# Altium PCB DMX8x8A-v1.PcbDoc
Units mm, origin at the board's own origin, x right, y up, seen from the top; angles counter-clockwise.
Board outline 152.4 x 101.6 mm, 2 copper layers (Top Layer, Bottom Layer); 46 components, 13 nets, 206 pads, 0 vias.
Unrouted connection lines stored in the file: 41.
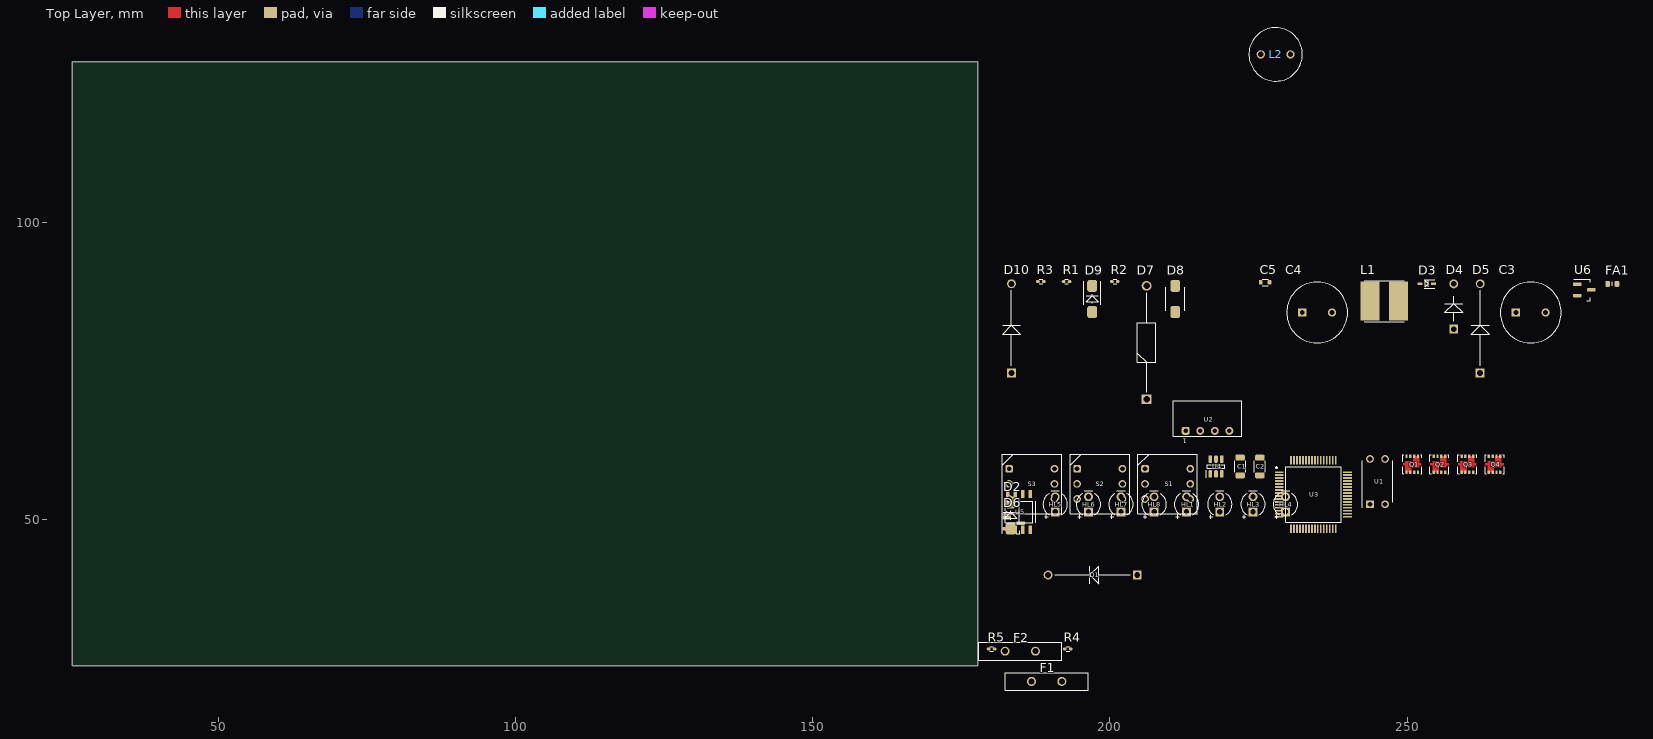
[diagram p0: Top Layer view]
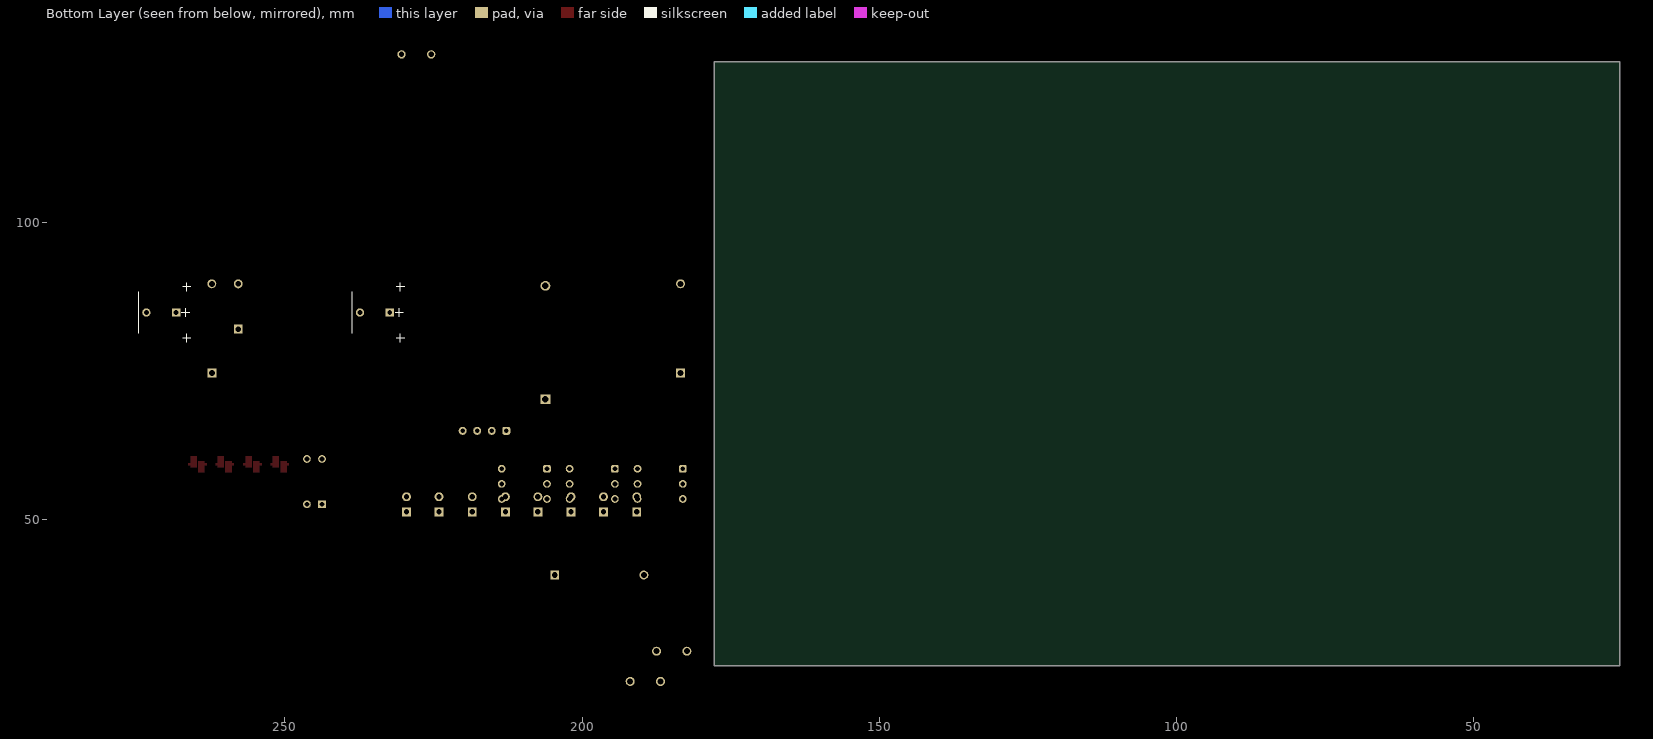
[diagram p1: Bottom Layer view, seen from below]

## Layer stack, top to bottom
Top Solder: solder mask 0.0102, Solder Resist, Dk 3.5
Top Layer: signal copper 0.0356
Dielectric 1: dielectric 0.32, FR-4, Dk 4.8
Bottom Layer: signal copper 0.0356
Bottom Solder: solder mask 0.0102, Solder Resist, Dk 3.5

## Board outline
25.4,25.4 177.8,25.4 177.8,127 25.4,127

## Design rules (kind name [scope] priority, off if disabled: settings)
Clearance [All] p1: gap=0.254 ignorepadtopadclearanceinfootprint=FALSE except(0: Arc-Hole Track-Hole SMDPad-Hole THPad-Hole Via-Hole Fill-Hole Poly-Hole Region-Hole Text-Hole)
PolygonConnect [All] p1: connectstyle=Relief reliefconductorwidth=0.254 reliefentries=4 polygonreliefangle="90 Angle" airgapwidth=0.254
RoomDefinition IOs.DMX8x8A [InComponentClass('IOs.DMX8x8A')] p1: confinementstyle=ConfineIn formatcopy=TRUE lockcomponents=FALSE outline 178.943,26.797 195.199,26.797 195.199,31.369 178.943,31.369
RoomDefinition Top.DMX8x8A-v1 [InComponentClass('Top.DMX8x8A-v1')] p2: confinementstyle=ConfineIn formatcopy=TRUE lockcomponents=FALSE outline 181.651,47.207 266.614,47.207 266.614,61.177 181.651,61.177
RoutingVias [All] p1: holewidth=0.711 width=1.27 viastyle="Through Hole" minholewidth=0.711 minwidth=1.27 maxholewidth=0.711 maxwidth=1.27
SolderMaskExpansion [All] p1: expansion=0.102 istentingtop=FALSE
Width [All] p1: maxlimit=0.254 minlimit=0.254 preferedwidth=0.254
30 further rules are at their usual default settings.

## Classes and differential pairs
component class IOs.DMX8x8A: F1 F2 R4 R5
component class Top.DMX8x8A-v1: C1 C2 C3 C4 C5 D1 D2 D3 D4 D5 D6 D7 D8 D9 D10 FA1 HL1 HL2 HL3 HL4 HL5 HL6 HL7 HL8 L1 L2 Q1 Q2 Q3 Q4 R1 R2 R3 S1 S2 S3 U1 U2 U3 U4 U5 U6

## Components (designator, comment, footprint, x,y, rotation, side; value= is the part's Value field where it differs from the comment)
C1 "10 50V 5%" C1206_r 221.91,58.891 r90 top value=10
C2 "10 50V 5%" C1206_r 225.212,58.891 r90 top value=10
C3 "35ZL470MEFC10X20" CAPPRD500W60D1025H1750 270.805,84.799 r0 top
C4 "35ZL470MEFC10X20" CAPPRD500W60D1025H1750 234.864,84.799 r0 top
C5 "1500p 25V 20%" C0603_r 226.101,89.879 r0 top value=1500p
D1 "SR102" "DO-204AL (DO-41)" 197.097,40.64 r180 top
D2 "SS14" "DO-214AC (SMA)" 183.302,50.636 r90 top
D3 "DDZ24" SOD323F 253.279,89.625 r0 top
D4 "1N5253B" "DO-204AH (DO-35).SLDPRT" 257.851,85.815 r90 top
D5 "1N4749A / BZV85C24" "DO-204AL (DO-41)" 262.296,82.132 r90 top
D6 "BZX84C24" "SOT-23-3 (3)" 183.81,49.366 r0 top
D7 "P6KE24CA" "DIOAD1910W90L670D310 (DO-15)" 206.162,70.194 r90 top
D8 "SMAJ30CA" "DO-214AC (SMA) biplar" 210.988,87.085 r90 top
D9 "SS14" "DO-214AC (SMA)" 197.018,87.085 r90 top
D10 "SR102" "DO-204AL (DO-41)" 183.429,82.132 r90 top
F1 "0ZRA0800FF" 0ZRA0800FF 189.357,22.733 r0 top
F2 "0ZRA0800FF" 0ZRA0800FF 184.912,27.813 r0 top
FA1 "MFU0603FF00800P100" FUSC1608X55N 284.521,89.625 r0 top
HL1 "3AR4UC10" "LED-2pin 2.54mm" 212.893,52.541 r90 top
HL2 "3AR4UC10" "LED-2pin 2.54mm" 218.481,52.541 r90 top
HL3 "3AR4UC10" "LED-2pin 2.54mm" 224.069,52.541 r90 top
HL4 "3AR4UC10" "LED-2pin 2.54mm" 229.53,52.541 r90 top
HL5 "3AR4UC10" "LED-2pin 2.54mm" 190.795,52.541 r90 top
HL6 "3AR4UC10" "LED-2pin 2.54mm" 196.383,52.541 r90 top
HL7 "3AR4UC10" "LED-2pin 2.54mm" 201.844,52.541 r90 top
HL8 "3AR4UC10" "LED-2pin 2.54mm" 207.432,52.541 r90 top
L1 "CDRH6D38NP-101NC" INDPM6767X400N 246.167,86.704 r0 top value=100uH
L2 "RLB0914-101KL" RLB0914 227.879,128.233 r0 top value=100uH
Q1 "AON7804" AON7804 250.866,59.272 r0 top
Q2 "AON7804" AON7804 255.438,59.272 r0 top
Q3 "AON7804" AON7804 260.137,59.272 r0 top
Q4 "AON7804" AON7804 264.709,59.272 r0 top
R1 "1k 5%" R0402_r 192.7,90.006 r0 top value=1k
R2 "3k 5%" R0402_r 200.828,90.006 r0 top value=3k
R3 "0 5%" R0402_r 188.382,90.006 r0 top value=0
R4 "0 5%" R0402_r 192.913,28.194 r0 top value=0
R5 "0 5%" R0402_r 180.086,28.194 r0 top value=0
S1 "1825007-1" 1825007-1 209.718,55.97 r0 top
S2 "1825007-1" 1825007-1 198.288,55.97 r0 top
S3 "1825007-1" 1825007-1 186.858,55.97 r0 top
U1 "FOD617BSD" FOD617BSD 245.024,56.351 r90 top
U2 "AM1SS-0505SJZ" AM1S 216.416,64.897 r180 top
U3 "STM32F103R8T7" "LQFP64 (QFP50P1200X1200X160-64N)" 234.229,54.192 r0 top
U4 "MAX3283E" "SOT23-6 (SOT95P280X145-6N)" 217.846,58.891 r90 top
U5 "LM2594DADJ" SOIC-8 184.699,51.271 r90 top
U6 "AP2120N-3.3TRG1" "SOT-23-3 (3)" 279.822,88.609 r0 top

## Footprints (in the part's own frame and the unit in brackets; to place one, negate y for a bottom-side part, rotate by r counter-clockwise, add the part's x,y. Pads: shape width x height; smd on the part's side, far side on the other; paste and mask are expansions set on the pad)
0ZRA0800FF [mm]
  round 1.515 hole 1.01: 1(-2.55,0) 2(2.55,0)
  silkscreen extent -7,-1.5 7,1.5, body extent -4.45,-1.5 4.45,1.5, height 12.9
1825007-1 [mm]
  rrect50% 1.3x1.3 hole 0.8: 1(-3.81,2.54)
  round 1.3 hole 0.8: 2(-3.81,0) 3(-3.81,-2.54) 4(3.81,-2.54) 5(3.81,0) 6(3.81,2.54)
  silkscreen extent -5,-5 5,5, body extent -5,-5 5,5, height 5.99
AM1S [mm]
  rrect50% 1.337x1.337 hole 0.78: 1(3.675,0)
  round 1.337 hole 0.78: 2(1.225,0) 3(-1.225,0) 4(-3.675,0)
  silkscreen extent -5.8,-5.1 5.8,0.9, body extent -5.84,-5.2 5.84,0.9, height 10.15
AON7804 [mm]
  rect 0.4x0.58 smd: D1(0.325,1.36) D1(0.975,1.36) D2(-0.975,-1.36) D2(-0.325,-1.36) G1(0.975,-1.36) G2(-0.975,1.36) S1(0.325,-1.36) S2(-0.325,1.36)
  Top Layer region: -1.202,0.215 -1.572,0.215 -1.572,-0.215 -1.202,-0.215
  Top Layer region: -0.098,0.575 -1.202,0.575 -1.202,-1.35 -0.098,-1.35
  Top Layer region: 1.202,-0.215 1.572,-0.215 1.572,0.215 1.202,0.215
  Top Layer region: 0.098,-0.575 1.202,-0.575 1.202,1.35 0.098,1.35
  silkscreen extent -1.6,-1.6 1.61,1.6, body extent -1.55,-1.55 1.55,1.55, height 0.9
C0603_r [mm] "0603"
  rrect50% 0.6x0.8 smd: 1(-0.75,0) 2(0.75,0)
  silkscreen extent -0.5,-0.55 0.5,0.55, body extent -0.8,-0.4 0.8,0.4, height 0.86
C1206_r [mm] "1206"
  rrect50% 1x1.6 smd: 1(-1.5,0) 2(1.5,0)
  silkscreen extent -1,-0.9 1,0.9, body extent -1.6,-0.8 1.6,0.8, height 1
CAPPRD500W60D1025H1750 [mm]
  rect 1.4x1.4 hole 0.8: 1(-2.5,0)
  round 1.4 hole 0.8: 2(2.5,0)
  silkscreen extent -5.13,-5.12 5.13,5.12, body extent -5.08,-5.08 5.08,5.08, height 20.32
"DIOAD1910W90L670D310 (DO-15)" [mm]
  rect 1.65x1.65 hole 1.1: 1(0,0)
  round 1.65 hole 1.1: 2(19.1,0)
  silkscreen extent 1.17,-1.55 17.93,1.55, body extent -0.45,-1.8 19.55,1.8, height 3.6
"DO-204AH (DO-35).SLDPRT" [mm] "Diode, Axial; Body 3.8 x 1.9 mm (LxDia. max), Lead Dia. 0.53 mm (max)"
  rect 1.5x1.5 hole 0.9: 1(-3.81,0)
  round 1.5 hole 0.9: 2(3.81,0)
  silkscreen extent -2.5,-1.5 1.7,1.5, body extent -4.07,-1.01 4.07,1, height 2.21
"DO-204AL (DO-41)" [mm]
  rect 1.5x1.5 hole 1: 1(-7.5,0)
  round 1.5 hole 1: 2(7.5,0)
  silkscreen extent -6.3,-1.5 6.4,1.5, body extent -7.93,-1.35 7.93,1.36, height 3.2
"DO-214AC (SMA)" [mm] "DO-214AC (SMA)"
  rrect50% 2.02x1.68 smd: 1(-2.2,0) 2(2.2,0)
  silkscreen extent -1,-1.4 3,1.4, body extent -2.6,-1.3 2.6,1.3, height 2.3
"DO-214AC (SMA) biplar" [mm] "DO-214AC (SMA) biplar"
  rrect50% 2.02x1.68 smd: 1(-2.2,0) 2(2.2,0)
  silkscreen extent -2,-1.6 2,1.6, body extent -2.6,-1.3 2.6,1.3, height 2.3
FOD617BSD [mm]
  rect 1.3x1.3 hole 0.8: 1(-3.81,1.27)
  round 1.3 hole 0.8: 2(-3.81,-1.27) 3(3.81,-1.27) 4(3.81,1.27)
  silkscreen extent -4.41,-2.55 3.5,2.55, body extent -3.96,-2.3 3.96,2.3, height 4.4
FUSC1608X55N [mm]
  rrect50% 0.81x0.98 smd: 1(-0.77,0) 2(0.77,0)
  silkscreen extent 0,-0.33 0,0.33, body extent -0.77,-0.43 0.77,0.43, height 0.55
INDPM6767X400N [mm]
  rect 3.2x6.55 smd: 1(-2.4,0) 2(2.4,0)
  silkscreen extent -3.35,-3.45 3.35,3.45, body extent -3.35,-3.35 3.35,3.35, height 4
"LED-2pin 2.54mm" [mm] "LED 2.54, 2 Leads"
  rect 1.5x1.5 hole 0.889: 1(-1.27,0)
  round 1.5 hole 0.889: 2(1.27,0)
  silkscreen extent -2.4,-2.06 2.3,2.06, body extent -1.9,-1.9 1.6,1.9, height 6.5
"LQFP64 (QFP50P1200X1200X160-64N)" [mm]
  rect 1.45x0.3 smd: 1(-5.75,3.75) 2(-5.75,3.25) 3(-5.75,2.75) 4(-5.75,2.25) 5(-5.75,1.75) 6(-5.75,1.25) 7(-5.75,0.75) 8(-5.75,0.25) 9(-5.75,-0.25) 10(-5.75,-0.75) 11(-5.75,-1.25) 12(-5.75,-1.75) 13(-5.75,-2.25) 14(-5.75,-2.75) 15(-5.75,-3.25) 16(-5.75,-3.75) 33(5.75,-3.75) 34(5.75,-3.25) 35(5.75,-2.75) 36(5.75,-2.25) 37(5.75,-1.75) 38(5.75,-1.25) 39(5.75,-0.75) 40(5.75,-0.25) 41(5.75,0.25) 42(5.75,0.75) 43(5.75,1.25) 44(5.75,1.75) 45(5.75,2.25) 46(5.75,2.75) 47(5.75,3.25) 48(5.75,3.75)
  rect 0.3x1.45 smd: 17(-3.75,-5.75) 18(-3.25,-5.75) 19(-2.75,-5.75) 20(-2.25,-5.75) 21(-1.75,-5.75) 22(-1.25,-5.75) 23(-0.75,-5.75) 24(-0.25,-5.75) 25(0.25,-5.75) 26(0.75,-5.75) 27(1.25,-5.75) 28(1.75,-5.75) 29(2.25,-5.75) 30(2.75,-5.75) 31(3.25,-5.75) 32(3.75,-5.75) 49(3.75,5.75) 50(3.25,5.75) 51(2.75,5.75) 52(2.25,5.75) 53(1.75,5.75) 54(1.25,5.75) 55(0.75,5.75) 56(0.25,5.75) 57(-0.25,5.75) 58(-0.75,5.75) 59(-1.25,5.75) 60(-1.75,5.75) 61(-2.25,5.75) 62(-2.75,5.75) 63(-3.25,5.75) 64(-3.75,5.75)
  silkscreen extent -6.35,-4.67 4.67,4.67, body extent -6,-6 6,6, height 1.6
R0402_r [mm] "0402"
  oval 0.635x0.508 smd: 1(-0.5,0) 2(0.5,0)
  silkscreen extent -0.3,-0.4 0.3,0.4, body extent -0.52,-0.27 0.53,0.28, height 0.4
RLB0914 [mm]
  round 1.4 hole 0.9: 1(-2.5,0) 2(2.5,0)
  silkscreen extent -4.5,-4.5 4.5,4.5, body extent -4.6,-4.6 4.6,4.6, height 13
SOD323F [mm] "SOD323F"
  rrect50% 0.84x0.46 smd: 1(1.14,0) 2(-1.14,0)
  silkscreen extent -0.4,-0.7 1.4,0.7, body extent -0.9,-0.67 0.9,0.67, height 0.75
SOIC-8 [mm] "SOIC-8"
  rect 1.4x0.6 smd: 1(-3,1.905) 2(-3,0.635) 3(-3,-0.635) 4(-3,-1.905) 5(3,-1.905) 6(3,-0.635) 7(3,0.635) 8(3,1.905)
  silkscreen extent -3.7,-2.8 1.8,2.8, body extent -3.1,-2.5 3.1,2.5, height 1.75
"SOT23-6 (SOT95P280X145-6N)" [mm]
  rrect50% 1.25x0.6 smd: 1(-1.25,0.95) 2(-1.25,0) 3(-1.25,-0.95) 4(1.25,-0.95) 5(1.25,0) 6(1.25,0.95)
  silkscreen extent -1.88,-1.45 0.28,1.6, body extent -1.4,-1.45 1.4,1.45, height 1.45
"SOT-23-3 (3)" [mm] "3-Lead Plastic SOT-23, 3rd Pin alone"
  rect 1.45x0.6 smd: 1(-1.175,0.95)
  rrect50% 1.45x0.6 smd: 2(-1.175,-0.95) 3(1.175,0)
  silkscreen extent -1.8,-1.8 1,1.8, body extent -1.22,-1.45 1.15,1.45, height 1

## Part data
C1 C2: library part "Ceramic SMD Cap_R", "Ceramic Chip Capacitor", Value2="50V 5%", ComponentLink1Description="Local Datasheet", ComponentLink1URL=V:\Libraries\Passives\RLC\Capacitors\AVXShortForm.pdf, HelpURL=https://www.mouser.com/catalog/supplier/library/AVXShortForm.pdf, SMD/TH=SMD
C3 C4: "Radial Lead Aluminum Electrolytic Capacitors", HelpURL=http://www.rubycon.co.jp/en/catalog/e_pdfs/aluminum/e_zl.pdf, SMD/TH=TH
C5: library part "Ceramic SMD Cap_R", "Ceramic Chip Capacitor", Value2="25V 20%", ComponentLink1Description="Local Datasheet", ComponentLink1URL=V:\Libraries\Passives\RLC\Capacitors\AVXShortForm.pdf, HelpURL=https://www.mouser.com/catalog/supplier/library/AVXShortForm.pdf
D1 D10: "Schottky Barrier Rectifier", HelpURL=https://ru.mouser.com/Semiconductors/Discrete-Semiconductors/Diodes-Rectifiers/Schottky-Diodes-Rectifiers/Datasheets/_/N-awhng?keyword=SR103, SMD/TH=TH
D2: "Surface Mount Schottky Barrier Rectifier 1A", HelpURL=http://www.vishay.com/docs/88746/ss12.pdf, SMD/TH=SMD
D3: library part DDZ, "Zener 0.5w SOD323F", Mfr="Diodes Incorporated", HelpURL=https://www.diodes.com/assets/Datasheets/ds31987.pdf, name1=24, SMD/TH=SMD
D4: "Zener DO-35", Mfr="ON Semi", HelpURL=https://www.onsemi.com/pub/Collateral/1N5221B-D.PDF, SMD/TH=SMD
D5: library part "Zener DO-41", "Zener DO-41", HelpURL=https://assets.nexperia.com/documents/data-sheet/1N4728A_SER.pdf, SMD/TH=TH
D6: library part BZX84C13LT1G, "Zener regulator, 27V", Mfr="ON Semi", ComponentLink1Description="Local Datasheet", ComponentLink1URL=V:\Libraries\Discrete\Diodes\Doc\BZX84C2V4LT1-D.PDF, HelpURL=https://www.onsemi.com/pub/Collateral/BZX84C2V4LT1-D.PDF
D7: library part P6KE, "TVS Axial 600W Unipolar 24V", HelpURL=https://m.littelfuse.com/~/media/electronics/datasheets/tvs_diodes/littelfuse_tvs_diode_p6ke_datasheet.pdf.pdf, SMD/TH=TH
D8: "TVS Uni 30V", Mfr=ST, ComponentLink1Description="Local Datasheet", ComponentLink1URL=V:\Libraries\Discrete\TVS\1724007.pdf, HelpURL=https://www.st.com/resource/en/datasheet/smaj.pdf, SMD/TH=SMD
D9: library part SS12, "Surface Mount Schottky Barrier Rectifier", HelpURL=http://www.vishay.com/docs/88746/ss12.pdf, Note="Check polarity", SMD/TH=SMD
F1 F2: library part 0ZRA, "Radial Leaded PTC 8/13.6A", HelpURL=https://www.belfuse.com/resources/datasheets/circuitprotection/ds-cp-0zra-series.pdf, SMD/TH=TH
FA1: library part "Fuse MFU", "Thin Film Chip Fuse", HelpURL=http://www.vishay.com/docs/28747/mfuserie.pdf, SMD/TH=SMD
HL1 HL2 HL3 HL4 HL5 HL6 HL7 HL8: "LED 3mm Red", HelpURL=http://www.triatron.ru/upload/catalog_photo/elements/pdf/006531.pdf, SMD/TH=TH
L1: library part CDRH6D38NP, "SMD Power Inductor 100uH 0.65A 265mOhms", Mfr=Sumida, HelpURL=http://products.sumida.com/products/pdf/CDRH6D38.pdf, SMD/TH=SMD
L2: "Radial Fixed Through Hole Inductor 100uH Bourns 100 uH +/-10%", HelpURL=https://www.bourns.com/pdfs/rlb.pdf, SMD/TH=TH
Q1 Q2 Q3 Q4: "30V Dual N-Channel MOSFET", ComponentLink1Description=Drawing, ComponentLink1URL=http://aosmd.com/res/packaging_information/DFN3x3_8L_EP2_P.pdf, HelpURL=http://aosmd.com/res/data_sheets/AON7804.pdf, SMD/TH=SMD
R1 R2 R3 R4 R5: library part "SMD Res_R", "Chip Resistor", Value2=5%, ComponentLink1Description="Local Datasheet", ComponentLink1URL=V:\Libraries\Passives\Resistors\_dbr_smd_resistor_product_overview_vmn_sg2189_1705.pdf, HelpURL=http://www.vishay.com/docs/49252/_dbr_smd_resistor_product_overview_vmn_sg2189_1705.pdf
S1 S2 S3: "Alcoswitch DIP, Rotary Switches, 10 Positions, Flush Actuator Style, Rotary Switch Style, Rotary DIP Switch Type, 10 Switches, Thermoplastic, Sealed", HelpURL=https://www.te.com/commerce/DocumentDelivery/DDEController?Action=showdoc&DocId=Customer+Drawing%7F1825007%7FA5%7Fpdf%7FEnglish%7FENG_CD_1825007_A5.pdf%7F1825007-1, SMD/TH=TH
U1: "4-Pin High Operating Temperature / Phototransistor Optocouplers", Manufacturer_Name="ON Semiconductor", Manufacturer_Part_Number=FOD814, Mouser Part Number=512-FOD814, RS Part Number=7599311P, Datasheet Link=http://www.onsemi.com/pub/Collateral/FOD814-D.PDF, Height=4.4mm, HelpURL=https://4donline.ihs.com/images/VipMasterIC/IC/FAIR/FAIRS24026/FAIRS24026-1.pdf?hkey=EC6BD57738AE6E33B588C5F9AD3CEFA7, Mouser Price/Stock=https://www.mouser.com/Search/Refine.aspx?Keyword=512-FOD814, RS Price/Stock=http://uk.rs-online.com/web/p/products/7599311P, SMD/TH=TH
U2: "Isolated DC-DC Converter 1 Watt", Manufacturer_Name=aimtec, Manufacturer_Part_Number=AM1SS-1205S-NZ, Datasheet Link=http://www.aimtec.com/site/Aimtec/files/Datasheet/HighResolution/am1ss-nz.pdf, Height=10.16mm, HelpURL=http://www.aimtec.com/site/Aimtec/files/Datasheet/HighResolution/am1ss-nz.pdf, SMD/TH=SMD
U3: "Medium-density performance line ARM®-based 32-bit MCU with 64 or 128 KB Flash, USB, CAN, 7 timers, 2 ADCs, 9 com. interfaces", Manufacturer_Name=STMicroelectronics, Mouser Part Number=511-STM32F103R8T7, RS Part Number=7239025P, Allied Price/Stock=http://www.alliedelec.com/stmicroelectronics-stm32f103r8t7/70391004/, Allied_Number=70391004, Datasheet Link=http://docs-asia.electrocomponents.com/webdocs/0ed0/0900766b80ed015c.pdf, Height=1.6mm, HelpURL=https://www.st.com/resource/en/datasheet/stm32f103r8.pdf, Manufacturer_Part_Number=STM32F103R8T7, Mouser Price/Stock=https://www.mouser.com/Search/Refine.aspx?Keyword=511-STM32F103R8T7, RS Price/Stock=http://uk.rs-online.com/web/p/products/7239025P, SMD/TH=SMD
U4: "15kV ESD-Protected 52Mbps, 3V to 5.5V, / SOT23 RS-485/RS-422 True Fail-Safe Receiver", Manufacturer_Name="Maxim Integrated", Manufacturer_Part_Number=MAX3283EAUT+T, Mouser Part Number=700-MAX3283EAUTT, RS Part Number=9237298, Datasheet Link=https://datasheets.maximintegrated.com/en/ds/MAX3280E-MAX3284E.pdf, Height=1.45mm, HelpURL=https://datasheets.maximintegrated.com/en/ds/MAX3280E-MAX3284E.pdf, Mouser Price/Stock=https://www.mouser.com/Search/Refine.aspx?Keyword=700-MAX3283EAUTT, RS Price/Stock=https://uk.rs-online.com/web/p/products/9237298, SMD/TH=SMD
U5: "0.5 A, Step-Down Switching Regulator", Mfr="ON Semiconductor", HelpURL=http://www.onsemi.com/pub/Collateral/LM2594-D.PDF, SMD/TH=SMD
U6: "High Speed, Extremely Low Noise LDO Regulator", Manufacturer_Name="Diodes Inc.", Mouser Part Number=621-AP2120N-3.3TRG1, RS Part Number=8287334P, Allied Price/Stock=https://www.alliedelec.com/diodesinc-ap2120n-3-3trg1/70550990/, Allied_Number=70550990, Datasheet Link=https://componentsearchengine.com/Datasheets/1/AP2120N-3.3TRG1.pdf, Height=1.2mm, HelpURL=https://www.diodes.com/assets/Datasheets/AP2120.pdf, Manufacturer_Part_Number=AP2120N-3.3TRG1, Mouser Price/Stock=https://www.mouser.com/Search/Refine.aspx?Keyword=621-AP2120N-3.3TRG1, RS Price/Stock=http://uk.rs-online.com/web/p/products/8287334P, SMD/TH=SMD

## Nets (pads, with @x,y where several pads share a name; then routed paths per layer and width w, separated by ;. In a path a pad name is that pad's centre, name@x,y a point inside that pad or via, vN(x,y) a via of type N, cw(c..) or ccw(c..) an arc to the next point about the centre after c; other vN are vias at no path point)
3.3V: U6.2
5V: C4.1 C5.2 L1.2 L2.2 R2.2 U6.3
+VIN: D1.2 D2.1
GND: C3.2 C4.2 D3.2 D4.2 D5.2 D6.1 D7.1 D8.1 D9.1 D10.2 R1.1 R3.1 U5.6 U6.1
NetC3_1: C3.1 D3.1 D4.1 D5.1 D6.3 D7.2 D8.2 FA1.2 U5.7
NetC5_1: C5.1 R1.2 R2.1 U5.4
NetD1_1: D1.1 D2.2 FA1.1
NetD9_2: D9.2 D10.1 L1.1 L2.1 U5.8
NetF1_1: F1.1 R4.1
NetF1_2: F1.2 R4.2
NetF2_1: F2.1 R5.1
NetF2_2: F2.2 R5.2
NetR3_2: R3.2 U5.5
pads on no net: C1.1 C1.2 C2.1 C2.2 D6.2 HL1.1 HL1.2 HL2.1 HL2.2 HL3.1 HL3.2 HL4.1 HL4.2 HL5.1 HL5.2 HL6.1 HL6.2 HL7.1 HL7.2 HL8.1 HL8.2 Q1.D1 Q1.D2 Q1.G1 Q1.G2 Q1.S1 Q1.S2 Q2.D1 Q2.D2 Q2.G1 Q2.G2 Q2.S1 Q2.S2 Q3.D1 Q3.D2 Q3.G1 Q3.G2 Q3.S1 Q3.S2 Q4.D1 Q4.D2 Q4.G1 Q4.G2 Q4.S1 Q4.S2 S1.1 S1.2 S1.3 S1.4 S1.5 S1.6 S2.1 S2.2 S2.3 S2.4 S2.5 S2.6 S3.1 S3.2 S3.3 S3.4 S3.5 S3.6 U1.1 U1.2 U1.3 U1.4 U2.1 U2.2 U2.3 U2.4 U3.1 U3.2 U3.3 U3.4 U3.5 U3.6 U3.7 U3.8 U3.9 U3.10 U3.11 U3.12 U3.13 U3.14 U3.15 U3.16 U3.17 U3.18 U3.19 U3.20 U3.21 U3.22 U3.23 U3.24 U3.25 U3.26 U3.27 U3.28 U3.29 U3.30 U3.31 U3.32 U3.33 U3.34 U3.35 U3.36 U3.37 U3.38 U3.39 U3.40 U3.41 U3.42 U3.43 U3.44 U3.45 U3.46 U3.47 U3.48 U3.49 U3.50 U3.51 U3.52 U3.53 U3.54 U3.55 U3.56 U3.57 U3.58 U3.59 U3.60 U3.61 U3.62 U3.63 U3.64 U4.1 U4.2 U4.3 U4.4 U4.5 U4.6 U5.1 U5.2 U5.3

## Text inside footprints (layer, text, board x,y; h text height)
U2: Top Overlay "1" at 212.916,63.597 h0.8 r180